# EAGLE board extruder-controller (EAGLE 5.06)
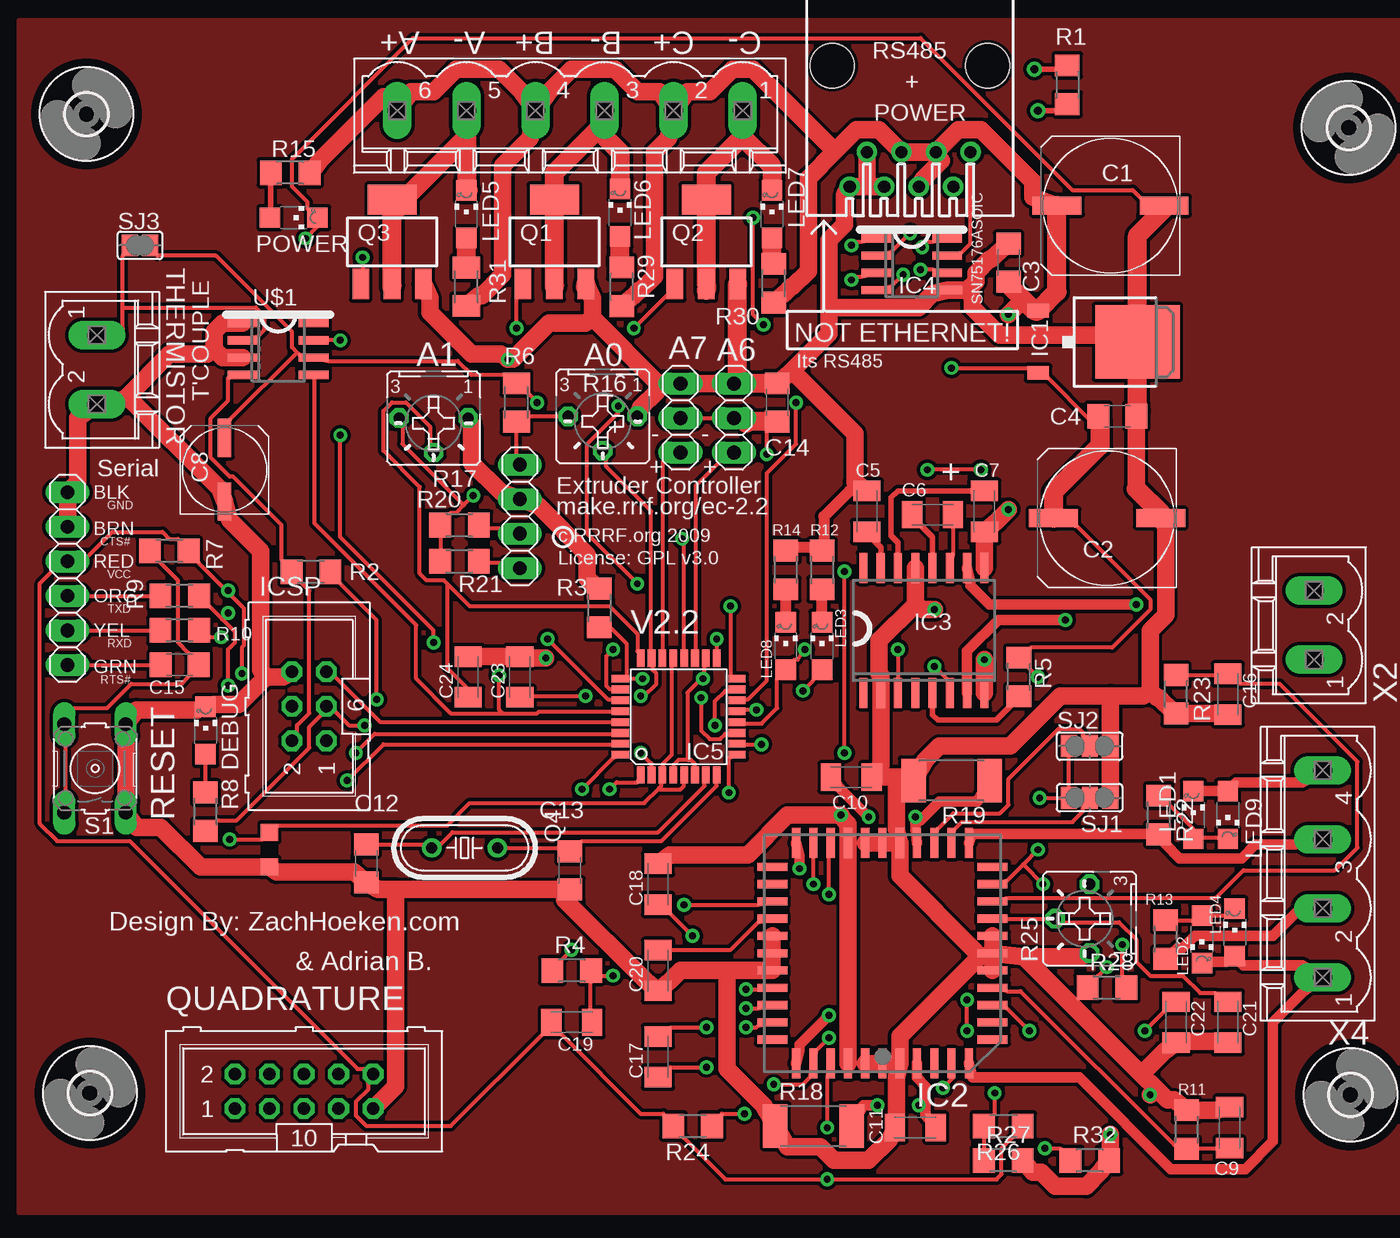
[diagram p0: board, top side]
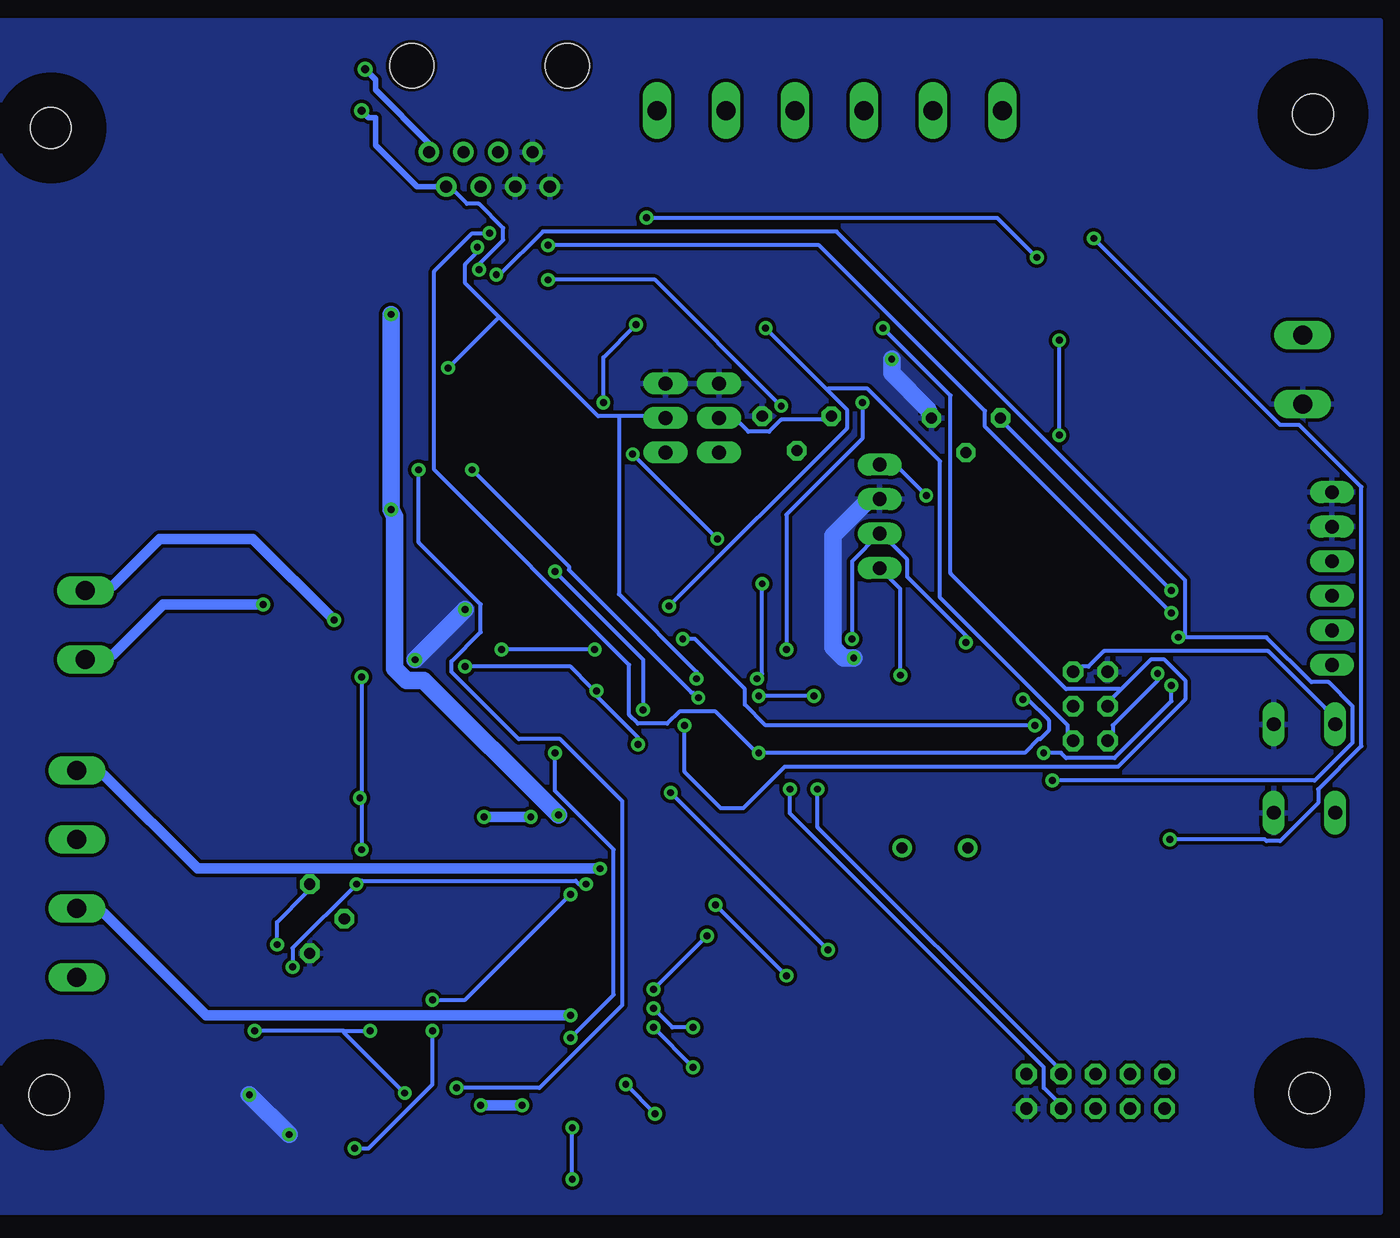
[diagram p1: board, bottom side, seen from below]

No outline drawn. Coordinates in mm, seen from the top.
Copper layers (1*16): Top 0.035mm / dielectric 1.5mm / Bottom 0.035mm
Design rules "reprap": minimum track width 8mil, minimum drill 20mil, track to track 10mil, track to pad 10mil, pad to pad 10mil, via to via 10mil, smd to smd 8mil, copper to edge 10mil, drill to drill 8mil, minimum pad ring 12mil, minimum via ring 10mil, stop-mask expansion 4mil, vias tented up to drill 25mil, thermal gap 10mil
Net classes: 0 default: width 0.305 mm; 1 power: width 1.27 mm; 2 motors: width 0.762 mm

## Footprints (pad centres in the part's own frame; a part is rotated, then mirrored left to right if it is on the bottom)
UD-10X10_NICHICON = smd 3.6 x 1.3: + 3.925,0; - -3.95,0
C1206 = smd 1.6 x 1.8: 1 -1.4,0; 2 1.4,0
C1206K = smd 1.5 x 2: 1 -1.5,0; 2 1.5,0
UD-6,3X5,8_NICHICON = smd 2.8 x 1: + 2.35,0; - -2.35,0
CHIPLED_1206 = smd 1.5 x 1.5: A 0,-1.75; C 0,1.75
3,0 = hole 3: 0,0
TO252 = smd 1 x 1.6: 1 -2.28,-4.8; 2 2.28,-4.8 | smd 5.4 x 6.2: 3 0,2.5
PLCC44 = smd 0.6 x 2.2: 1 0,8.1; 2 -1.27,8.1; 3 -2.54,8.1; 4 -3.81,8.1; 5 -5.08,8.1; 6 -6.35,8.1; 18 -6.35,-8.1; 19 -5.08,-8.1; 20 -3.81,-8.1; 21 -2.54,-8.1; 22 -1.27,-8.1; 23 0,-8.1; 24 1.27,-8.1; 25 2.54,-8.1; 26 3.81,-8.1; 27 5.08,-8.1; 28 6.35,-8.1; 40 6.35,8.1; 41 5.08,8.1; 42 3.81,8.1; 43 2.54,8.1; 44 1.27,8.1 | smd 2.2 x 0.6: 7 -8.1,6.35; 8 -8.1,5.08; 9 -8.1,3.81; 10 -8.1,2.54; 11 -8.1,1.27; 12 -8.1,0; 13 -8.1,-1.27; 14 -8.1,-2.54; 15 -8.1,-3.81; 16 -8.1,-5.08; 17 -8.1,-6.35; 29 8.1,-6.35; 30 8.1,-5.08; 31 8.1,-3.81; 32 8.1,-2.54; 33 8.1,-1.27; 34 8.1,0; 35 8.1,1.27; 36 8.1,2.54; 37 8.1,3.81; 38 8.1,5.08; 39 8.1,6.35
SO16W = smd 0.6 x 2.2: 1 -4.445,-4.6; 2 -3.175,-4.6; 3 -1.905,-4.6; 4 -0.635,-4.6; 5 0.635,-4.6; 6 1.905,-4.6; 7 3.175,-4.6; 8 4.445,-4.6; 9 4.445,4.6; 10 3.175,4.6; 11 1.905,4.6; 12 0.635,4.6; 13 -0.635,4.6; 14 -1.905,4.6; 15 -3.175,4.6; 16 -4.445,4.6
SO08 = smd 0.6 x 2.2: 1 -1.905,-2.6; 2 -0.635,-2.6; 3 0.635,-2.6; 4 1.905,-2.6; 5 1.905,2.6; 6 0.635,2.6; 7 -0.635,2.6; 8 -1.905,2.6
TQFP32-08 = smd 1.27 x 0.559: 1 -4.293,2.8; 2 -4.293,2; 3 -4.293,1.2; 4 -4.293,0.4; 5 -4.293,-0.4; 6 -4.293,-1.2; 7 -4.293,-2; 8 -4.293,-2.8; 17 4.293,-2.8; 18 4.293,-2; 19 4.293,-1.2; 20 4.293,-0.4; 21 4.293,0.4; 22 4.293,1.2; 23 4.293,2; 24 4.293,2.8 | smd 0.559 x 1.27: 9 -2.8,-4.293; 10 -2,-4.293; 11 -1.2,-4.293; 12 -0.4,-4.293; 13 0.4,-4.293; 14 1.2,-4.293; 15 2,-4.293; 16 2.8,-4.293; 25 2.8,4.293; 26 2,4.293; 27 1.2,4.293; 28 0.4,4.293; 29 -0.4,4.293; 30 -1.2,4.293; 31 -2,4.293; 32 -2.8,4.293
520426-4 = drill 0.889 round: 1 -4.445,6.35; 2 -3.175,8.89; 3 -1.905,6.35; 4 -0.635,8.89; 5 0.635,6.35; 6 1.905,8.89; 7 3.175,6.35; 8 4.445,8.89 | hole 3.251: -5.715,0; 5.715,0
1X04 = drill 1.016 long: 1 -3.81,0; 2 -1.27,0; 3 1.27,0; 4 3.81,0
1X06 = drill 1.016 long: 1 -6.35,0; 2 -3.81,0; 3 -1.27,0; 4 1.27,0; 5 3.81,0; 6 6.35,0
1X03 = drill 1.016 long: 1 -2.54,0; 2 0,0; 3 2.54,0
SOT223 = smd 1.219 x 2.235: 1 -2.311,-3.099; 2 0,-3.099; 3 2.311,-3.099 | smd 3.6 x 2.2: 4 0,3.099
HC49/S = drill 0.813 round: 1 -2.413,0; 2 2.413,0
R1206 = smd 1.6 x 1.803: 1 -1.422,0; 2 1.422,0
M1206 = smd 1.6 x 2: 1 -1.4,0; 2 1.4,0
B25P = drill 0.813 octagon: A -2.54,0; E 2.54,0; S 0,2.54
R2512 = smd 1.8 x 3.2: 1 -2.8,0; 2 2.8,0
B3F-10XX = drill 1.016 long: 1 -3.251,2.261; 2 3.251,2.261; 3 -3.251,-2.261; 4 3.251,-2.261
SJ_2 = smd 1.168 x 1.6: 1 -1.524,0; 2 0,0; 3 1.524,0
SJ = smd 1.168 x 1.6: 1 -0.762,0; 2 0.762,0
ML6 = drill 0.914 octagon: 1 -2.54,-1.27; 2 -2.54,1.27; 3 0,-1.27; 4 0,1.27; 5 2.54,-1.27; 6 2.54,1.27
ML10 = drill 0.914 octagon: 1 -5.08,-1.27; 2 -5.08,1.27; 3 -2.54,-1.27; 4 -2.54,1.27; 5 0,-1.27; 6 0,1.27; 7 2.54,-1.27; 8 2.54,1.27; 9 5.08,-1.27; 10 5.08,1.27
MSTBV6 = drill 1.397 long: 1 -12.7,0; 2 -7.62,0; 3 -2.54,0; 4 2.54,0; 5 7.62,0; 6 12.7,0
MSTBV2 = drill 1.397 long: 1 -2.54,0; 2 2.54,0
MSTBV4 = drill 1.397 long: 1 -7.62,0; 2 -2.54,0; 3 2.54,0; 4 7.62,0
GND-GNDA = smd 1.27 x 1.27: GND -1.27,0; GNDA 1.27,0

## Placement (x,y rotation side)
C1  100uF  [UD-10X10_NICHICON]  80.26,70.23 180 top
C2  100uF  [UD-10X10_NICHICON]  80.01,47.24 180 top
C3  100nF  [C1206]  72.77,66.04 90 top
C4  100nF  [C1206]  80.77,54.74 0 top
C5  .22uF  [C1206K]  62.36,47.75 270 top
C6  100nF  [C1206K]  67.18,47.5 180 top
C7  100nF  [C1206K]  70.99,47.75 270 top
C8  10uF  [UD-6,3X5,8_NICHICON]  15.11,50.8 90 top
C9  1nF  [C1206K]  89.03,2.41 90 top
C10  100nF  [C1206K]  61.21,28.19 0 top
C11  100nF  [C1206K]  65.91,2.41 0 top
C12  16pf  [C1206]  25.53,21.84 90 top
C13  16pf  [C1206]  40.51,21.34 90 top
C14  100nF  [C1206]  55.75,55.75 270 top
C15  100nF  [C1206]  11.81,36.45 180 top
C16  1nF  [C1206K]  88.9,34.29 270 top
C17  220nF  [C1206K]  46.99,7.62 90 top
C18  220nF  [C1206K]  46.99,20.32 90 top
C19  1nF  [C1206K]  40.64,10.16 180 top
C20  220nF  [C1206K]  46.99,13.97 90 top
C21  100nF  [C1206K]  88.9,10.16 270 top
C22  100nF  [C1206K]  85.09,10.16 270 top
C23  100nF  [C1206K]  36.83,35.56 90 top
C24  100nF  [C1206K]  33.02,35.56 90 top
DEBUG  [CHIPLED_1206]  13.72,31.62 0 top
H1  MOUNT-HOLE3.0  [3,0]  5.21,4.95 0 top
H2  MOUNT-HOLE3.0  [3,0]  4.95,76.96 0 top
H3  MOUNT-HOLE3.0  [3,0]  97.92,4.83 0 top
H4  MOUNT-HOLE3.0  [3,0]  97.79,75.95 90 top
IC1  7805DT  [TO252]  79.76,60.2 270 top
IC2  A3977  [PLCC44]  63.5,15.24 180 top
IC3  A3949  [SO16W]  66.55,38.99 0 top
IC4  SN75176ASOIC  [SO08]  65.66,65.91 270 top
IC5  ATMEGA168  [TQFP32-08]  48.51,32.64 90 top
J1  [520426-4]  65.53,80.52 180 top
JP4  [1X04]  36.83,47.37 270 top
JP5  [1X06]  3.56,42.8 270 top
JP6  [1X03]  52.58,54.61 270 top
JP7  [1X03]  48.64,54.61 270 top
LED1  1  [CHIPLED_1206]  86.36,25.4 0 top
LED2  1  [CHIPLED_1206]  87,16.26 180 top
LED3  2  [CHIPLED_1206]  59.05,37.85 0 top
LED4  [CHIPLED_1206]  89.41,16.76 0 top
LED5  [CHIPLED_1206]  32.89,69.6 0 top
LED6  [CHIPLED_1206]  44.2,69.72 0 top
LED7  [CHIPLED_1206]  55.37,69.6 0 top
LED8  [CHIPLED_1206]  56.39,37.85 0 top
LED9  [CHIPLED_1206]  88.9,25.4 180 top
POWER  [CHIPLED_1206]  20.19,69.34 270 top
Q1  NIF5002  [SOT223]  39.37,67.56 0 top
Q2  NIF5002  [SOT223]  50.55,67.56 0 top
Q3  NIF5002  [SOT223]  27.43,67.56 0 top
Q4  16MHZ  [HC49/S]  32.77,22.99 180 top
R1  180  [R1206]  77.09,79.12 90 top
R2  4.7k  [R1206]  21.46,43.31 180 top
R3  4.7k  [R1206]  42.67,40.64 90 top
R4  1K  [R1206]  40.64,13.97 0 top
R5  10K  [R1206]  73.53,35.56 270 top
R6  4.7K  [M1206]  36.58,55.75 270 top
R7  10K  [R1206]  11.05,44.83 0 top
R8  1K  [R1206]  13.72,25.65 270 top
R9  1K  [R1206]  11.81,41.53 0 top
R10  1K  [R1206]  11.81,38.99 0 top
R11  33K  [R1206]  85.85,2.29 90 top
R12  1K  [R1206]  59.05,43.43 90 top
R13  1K  [R1206]  84.33,16.26 270 top
R14  1K  [R1206]  56.39,43.43 270 top
R15  1K  [R1206]  19.94,72.64 0 top
R16  10K  [B25P]  42.93,54.74 180 top
R17  10K  [B25P]  30.48,54.61 180 top
R18  0.25  [R2512]  58.42,2.54 0 top
R19  0.25  [R2512]  68.58,27.94 180 top
R20  4.7K  [R1206]  32.38,46.74 180 top
R21  4.7K  [R1206]  32.38,44.07 180 top
R22  1K  [R1206]  83.82,25.4 270 top
R23  33K  [R1206]  85.09,34.29 270 top
R24  1K  [R1206]  49.53,2.54 180 top
R25  10K  [B25P]  78.74,17.78 90 top
R26  10K  [R1206]  72.39,2.54 180 top
R27  1K  [R1206]  72.39,0 0 top
R28  2K2  [R1206]  80.01,12.7 0 top
R29  1K  [R1206]  44.32,64.26 270 top
R30  1K  [R1206]  55.5,64.52 270 top
R31  1K  [M1206]  32.89,64.26 270 top
R32  1K  [R1206]  78.74,0 0 top
S1  [B3F-10XX]  5.59,28.83 90 top
SJ1  [SJ_2]  78.74,26.67 180 top
SJ2  [SJ_2]  78.74,30.48 0 top
SJ3  [SJ]  8.89,67.31 0 top
SV1  [ML6]  21.34,33.4 90 top
SV2  [ML10]  20.95,5.08 0 top
U$1  MAX6675  [SO08]  19.05,59.69 270 top
X1  MSTBV6  [MSTBV6]  40.51,77.22 180 top
X2  MSTBV2  [MSTBV2]  95.25,39.37 90 top
X3  MSTBV2  [MSTBV2]  5.71,58.17 270 top
X4  MSTBV4  [MSTBV4]  95.89,21.08 90 top
~NUDEV~1  GND-GNDA  [GND-GNDA]  18.41,22.86 90 top

## Library data of the parts
C1-C11 C14 C16-C24 R4 R6 R11-R14 R18-R24 R26-R32 = rcl
C12 C13 C15 R1-R3 R5 R7-R10 R15 = resistor
DEBUG LED1-LED9 POWER = led
H1-H4 = holes
IC1 = linear
IC2 = allegro
IC3 IC4 U$1 = reprap
IC5 = SparkFun
J1 = con-amp
JP4-JP7 = pinhead
Q1-Q3 = transistor-power
Q4 = crystal
R16 R17 R25 = pot
S1 = switch-omron
SJ1-SJ3 = jumper
SV1 SV2 = con-harting-ml
X1-X4 = con-phoenix-508
~NUDEV~1 = supply1

## Nets
+12V [power]: C1.+ C3.1 C7.2 C18.2 IC1.1 IC2.25 IC2.43 IC3.9 J1.3 J1.4 J1.5 R15.2 R29.2 R30.2 R31.2 X1.2 X1.4 X1.6
A0: C23.1 IC5.23 R16.S
A1: C24.1 IC5.24 R17.S
A2: IC4.3 IC5.25 R3.1
A3: C8.+ IC5.26 R6.1 SJ3.2 U$1.6
A6: IC5.19 JP6.3
A7: IC5.22 JP7.3
D2: IC5.32 SV2.8
D3: IC5.1 SV2.7
D4: IC4.2 IC5.2 R2.1
D5: IC5.9 R4.1
D6: IC3.6 IC5.10 LED3.A
D7: IC2.5 IC5.11
D8: IC3.3 IC5.12 LED8.A
D9: IC2.41 IC5.13 R24.1
D10: IC5.14 Q3.1
D11: IC5.15 Q1.1 SV1.4
D12: IC5.16 Q2.1 SV1.1
D13: IC5.17 R8.2 SV1.3
GND [power]: C2.- C3.2 C4.2 C5.1 C8.- C9.2 C10.2 C11.1 C12.1 C13.1 C14.1 C16.2 C20.1 C21.2 C22.2 C23.2 C24.2 DEBUG.C IC1.3 IC2.1 IC2.2 IC2.11 IC2.12 IC2.13 IC2.22 IC2.23 IC2.24 IC2.33 IC2.34 IC2.35 IC2.44 IC3.2 IC3.8 IC3.13 IC4.5 J1.6 J1.7 J1.8 JP4.2 JP5.1 JP5.2 JP6.1 JP7.1 Q1.3 Q2.3 Q3.3 R3.2 R11.2 R12.2 R14.1 R16.A R17.A R18.1 R19.2 R23.2 R25.A R27.2 R32.2 S1.3 S1.4 SJ1.1 SJ2.3 SV1.6 SV2.9 U$1.1 U$1.3 X3.2 ~NUDEV~1.GND
GNDA: C1.- IC5.3 IC5.5 IC5.21 POWER.C ~NUDEV~1.GNDA
N$1: IC4.7 J1.1 R1.2
N$2: IC4.6 J1.2 R1.1
N$3 [motors]: IC2.6 LED2.C LED4.A X4.1
N$4 [motors]: IC2.40 R13.2 X4.2
N$5: C19.1 IC2.31 R4.2
N$7: LED2.A LED4.C R13.1
N$8: DEBUG.A R8.1
N$9: C9.1 IC2.10 R11.1
N$10 [motors]: IC3.7 X2.2
N$11: C5.2 IC3.15
N$12: C16.1 IC2.15 R23.1
N$13: C6.2 IC3.12
N$14: C6.1 IC3.11
N$15: C7.1 IC3.14
N$16: IC3.5 R5.2
N$17 [motors]: IC3.10 X2.1
N$18 [motors]: C11.2 IC2.3 R18.2
N$19: LED3.C R12.1
N$20: C14.2 IC5.20
N$21: JP5.5 R10.1
N$22: JP5.4 R9.1
N$23: LED1.A LED9.C R22.1
N$24: LED8.C R14.2
N$25: POWER.A R15.1
N$26 [motors]: IC2.28 LED1.C LED9.A X4.4
N$27 [motors]: IC2.18 R22.2 X4.3
N$28: IC2.26 R32.1
N$30 [motors]: C10.1 IC2.21 R19.1
N$31: C12.2 IC5.7 Q4.2
N$32: C13.2 IC5.8 Q4.1
N$33 [power]: LED7.C Q2.2 Q2.4 X1.1
N$34 [power]: LED6.C Q1.2 Q1.4 X1.3
N$35 [power]: LED5.C Q3.2 Q3.4 X1.5
N$36: C18.1 IC2.36
N$37: C20.2 IC2.32
N$38: C17.2 IC2.37
N$39: C17.1 IC2.38
N$41: LED5.A R31.1
N$42: LED6.A R29.1
N$43: LED7.A R30.1
N$45: C22.1 IC2.9 R26.2 R27.1
N$46: IC2.19 SJ1.2
N$47: IC2.20 SJ2.2
N$48: R25.E R28.2
N$49: C21.1 IC2.14 R25.S
RESET: C15.1 IC5.29 R7.1 S1.1 S1.2 SV1.5
RTS#: C15.2 JP5.6
RX: IC4.1 IC5.30 R9.2
SCL: IC5.28 JP4.4 R21.1 U$1.5
SDA: IC5.27 JP4.3 R20.1 U$1.7
TCPL: SJ3.1 U$1.2 X3.1
TX: IC4.4 IC5.31 R10.2
VCC: C2.+ C4.1 C19.2 IC1.2 IC2.16 IC2.27 IC2.42 IC4.8 IC5.4 IC5.6 IC5.18 JP4.1 JP5.3 JP6.2 JP7.2 R2.2 R5.1 R6.2 R7.2 R16.E R17.E R20.2 R21.2 R24.2 R26.1 R28.1 SJ1.3 SJ2.1 SV1.2 SV2.10 U$1.4

## Tracks (layer width: path | path; a pad name or v marks a point on that pad's centre or on a via)
+12V  (via drill 0.51)
  Top 1.27: R29.2 45.21,63.63 45.59,64.01 45.72,64.01 46.74,65.02 46.74,74.17 47.75,75.18 X1.2 | R31.2 33.78,63.63 34.04,63.63 35.56,65.15 35.56,73.15 37.59,75.18 X1.4 | X1.4 36.96,78.61 35.31,80.26 32.13,80.26 30.48,78.61 28.83,78.61 X1.6 26.8,78.23 22.1,73.53 21.72,73.03 R15.2 | X1.2 47.12,78.61 45.47,78.61 43.81,80.26 40.64,80.26 38.99,78.61 X1.4 | 60.33,25.4 56.52,25.4 53.59,22.48 47.88,22.48 C18.2 | 60.33,25.4 60.96,24.77 IC2.25 IC2.43 | IC3.9 C7.2 71.88,46.99 v72.77,47.88 | v72.77,62.23 73.85,63.31 | J1.4 66.55,72.26 67.82,73.53 J1.3 | 60.01,74.23 61.59,75.82 63.25,75.82 J1.5 J1.3 | 60.01,74.23 58.04,72.26 58.04,65.41 56.9,64.26 56.77,64.26 56.39,63.88 R30.2 | C1.+ 74.55,70.87 74.55,72.01 70.74,75.82 69.09,75.82 J1.3 | 60.33,25.4 v60.45,25.4 | X1.2 49.15,78.61 50.8,78.61 52.45,80.26 53.98,80.26 60.01,74.23
  Top 1.397: C1.+ 76.34,63.89 74.93,62.48 74.94,62.48 IC1.1 74.68,62.48 73.85,63.31 72.64,64.52 C3.1
  Bottom 1.27: v72.77,62.23 v72.77,47.88 72.52,47.37 72.52,36.2 71.63,35.31 70.36,35.31 v60.45,25.4
A0  (via drill 0.51)
  Top 0.305: R16.S 43.18,51.56 43.18,51.05 46.48,47.75 46.48,37.47 IC5.23 46.61,36.83 46.61,36.07 46.86,35.81 46.86,35.05 45.97,34.16 v45.72,34.16 | v41.66,34.16 36.83,34.16 C23.1
  Bottom 0.305: v41.66,34.16 v45.72,34.16
A1
  Top 0.305: 31.56,42.35 31.24,42.67 29.97,42.67 29.46,43.18 29.46,49.53 26.8,52.2 26.8,55.12 27.43,55.75 28.45,55.75 30.23,53.98 30.23,52.7 R17.S | 31.56,42.35 33.15,40.77 43.43,40.77 45.47,38.73 45.47,37.47 IC5.24 | C24.1 33.02,34.67 31.5,36.2 31.5,42.29 31.56,42.35
A2  (via drill 0.51)
  Top 0.305: R3.1 43.56,39.12 44.7,37.97 44.7,35.69 IC5.25 44.83,35.43 v45.85,35.43 | v61.21,64.77 61.47,65.02 61.98,65.02 IC4.3 | v44.07,55.5 44.07,54.99 41.78,52.7 41.78,46.1 v45.47,42.42
  Bottom 0.305: v61.21,64.77 53.34,64.77 v44.07,55.5 | v45.47,42.42 45.47,35.81 v45.85,35.43
A3  (via drill 0.51)
  Top 0.305: v43.69,37.59 43.18,37.08 43.18,34.92 43.43,34.67 43.69,34.67 IC5.26 | v38.1,55.75 37.47,56.39 R6.1 35.69,57.78 33.27,57.78 32.26,58.8 22.73,58.8 U$1.6 20.57,59.31 20.45,59.44 | 20.45,59.44 20.07,59.82 20.07,60.96 14.48,66.55 10.16,66.55 SJ3.2 | 20.45,59.44 15.49,54.48 C8.+
  Bottom 0.305: v43.69,37.59 43.69,47.5 38.1,53.09 v38.1,55.75
A6
  Top 0.305: IC5.19 49.78,37.47 49.78,49.66 51.44,51.31 JP6.3
A7
  Top 0.305: IC5.22 47.37,37.47 47.37,51.44 JP7.3
D2  (via drill 0.51)
  Top 0.305: v41.4,27.3 43.69,29.59 IC5.32
  Bottom 0.305: v41.4,27.3 41.4,24.51 23.88,6.99 SV2.8
D3  (via drill 0.51)
  Top 0.305: v43.43,27.3 43.94,27.81 45.47,27.81 IC5.1
  Bottom 0.305: v43.43,27.3 43.43,25.53 24.77,6.86 24.77,5.33 23.88,4.45 SV2.7
D4  (via drill 0.51)
  Top 0.305: v45.72,29.97 46.48,29.21 46.48,28.96 IC5.2 | v26.29,33.91 26.29,39.75 23.62,42.42 R2.1 | v65.53,68.2 64.14,66.8 IC4.2
  Bottom 0.305: v26.29,33.91 25.91,33.91 24.38,32.38 24.38,31.62 25.02,30.99 25.15,30.99 26.16,29.97 v45.72,29.97 46.1,30.23 48.9,33.02 51.56,33.02 52.45,32.13 54.61,32.13 55.24,32.77 55.24,36.45 69.6,50.8 69.6,65.41 66.8,68.2 v65.53,68.2
D5  (via drill 0.51)
  Top 0.305: v52.2,27.05 52.2,29.59 IC5.9 | v40.64,15.49 40.01,14.86 R4.1
  Bottom 0.305: v40.64,15.49 v52.2,27.05
D6  (via drill 0.51)
  Top 0.305: v54.61,30.61 53.34,30.61 IC5.10 | v57.66,34.54 58.42,35.31 LED3.A | v67.31,36.32 68.2,35.43 IC3.6
  Bottom 0.305: v54.61,30.61 54.61,31.11 57.66,34.16 v57.66,34.54 58.04,34.8 59.56,36.32 v67.31,36.32
D7  (via drill 0.51)
  Top 0.305: v50.16,34.04 50.16,31.62 50.8,30.99 51.56,30.99 51.94,31.37 52.2,31.37 IC5.11 | v70.74,50.8 v66.8,50.8 | v67.94,5.33 68.71,6.1 IC2.5
  Bottom 0.305: v50.16,34.04 50.55,34.42 50.67,34.42 59.69,43.43 59.69,43.69 v66.8,50.8 | v70.74,50.8 70.74,45.47 66.17,40.89 66.17,38.86 68.33,36.7 68.33,35.94 63.37,30.99 60.33,30.99 55.75,26.42 55.75,11.43 61.85,5.33 v67.94,5.33
D8  (via drill 0.51)
  Top 0.305: v57.78,37.59 57.28,36.83 57.02,36.83 LED8.A 55.75,35.43 55.75,33.27 54.61,32.13 53.34,32.13 IC5.12 | v64.64,37.59 IC3.3
  Bottom 0.305: v57.78,37.59 v64.64,37.59
D9  (via drill 0.51)
  Top 0.305: v54.23,33.15 53.34,33.15 IC5.13 | v60.71,29.97 v60.71,43.31 | v59.56,9.02 58.67,8.13 IC2.41 58.17,6.1 57.66,5.59 v55.5,5.59 | v53.34,3.43 51.69,3.43 R24.1
  Bottom 0.305: v54.23,33.15 54.23,36.83 v60.71,43.31 | v60.71,29.97 60.71,27.18 56.39,22.86 56.39,12.19 v59.56,9.02 | v53.34,3.43 v55.5,5.59
D10  (via drill 0.51)
  Top 0.305: v57.15,55.75 57.15,52.7 54.99,50.55 54.99,35.31 53.59,33.91 53.34,33.91 IC5.14 | v54.74,61.47 53.98,62.23 v53.98,69.34 | v25.27,66.42 25.27,65.53 Q3.1
  Bottom 0.305: v57.15,55.75 57.15,59.05 v54.74,61.47 | v53.98,69.34 28.19,69.34 v25.27,66.42
D11  (via drill 0.51)
  Top 0.305: v51.18,32 51.18,33.78 51.94,34.54 52.2,34.54 IC5.15 | v36.58,61.21 36.58,63.37 Q1.1
  Bottom 0.305: v51.18,32 51.18,28.57 48.51,25.91 46.86,25.91 43.81,28.96 19.3,28.96 14.35,33.91 14.35,35.31 15.88,36.83 16.89,36.83 19.11,34.61 | 19.11,34.61 19.68,34.04 SV1.4 | v36.58,61.21 31.62,56.26 31.62,43.18 23.11,34.67 19.18,34.67 19.11,34.61
D12  (via drill 0.51)
  Top 0.305: v52.32,40.77 52.32,35.69 IC5.16 | v45.21,61.21 47.75,63.75 Q2.1
  Bottom 0.305: v52.32,40.77 39.24,53.85 39.24,55.24 40.7,56.71 | 40.7,56.71 v45.21,61.21 | SV1.1 22.99,31.5 22.99,32 32.38,41.4 32.38,51.44 37.72,56.77 40.64,56.77 40.7,56.71
D13  (via drill 0.51)
  Top 0.305: v51.31,38.35 51.31,37.47 IC5.17 | v25.4,32 24.26,32 23.24,33.02 SV1.3 22.23,32.77 21.34,31.88 21.34,30.35 16,25.02 14.61,25.02 R8.2
  Bottom 0.305: v51.31,38.35 50.42,38.35 46.74,34.67 46.74,33.53 45.21,32 v25.4,32
GND  (via drill 0.51)
  Top 0.813: C5.1 61.06,49.25 59.18,47.37 59.18,45.21 59.05,45.09 | 59.05,45.09 R12.2 | 56.39,44.83 56.26,44.7 | 56.39,44.83 R14.1 | 59.05,45.09 56.64,45.09 56.39,44.83
  Top 1.27: 52.83,57.15 JP6.1 JP7.1 47.12,57.02 | 42.16,61.98 42.16,63.37 Q1.3 | 47.12,57.02 42.16,61.98 | R16.A 45.72,55.37 46.86,56.52 47.12,57.02 | 42.16,61.98 41.66,61.59 38.99,61.59 36.32,58.93 v35.94,58.93 35.43,59.31 33.27,59.31 30.23,62.36 30.23,63.37 Q3.3 | 18.16,35.56 19.43,35.56 SV1.6 | 18.16,35.56 16.13,33.53 14.35,33.53 DEBUG.C 13.08,33.15 8.64,33.15 S1.4 7.87,30.48 7.87,27.18 S1.3 8.64,24.51 10.41,24.51 13.34,21.59 ~NUDEV~1.GND 18.92,21.21 24.64,21.21 C12.1 26.42,19.94 27.69,19.94 | 18.16,35.56 17.78,36.07 17.78,44.83 15.49,47.12 C8.- 14.73,49.4 7.94,56.2 | 27.69,19.94 39.62,19.94 C13.1 40.13,19.18 46.1,13.21 C20.1 47.88,13.21 48.64,13.97 52.07,13.97 | SV2.9 27.69,5.46 27.69,19.94 | C16.2 88.01,32.89 85.98,32.89 R23.2 84.2,33.66 83.82,34.04 83.69,34.04 83.19,34.54 | 83.19,34.54 83.19,38.99 84.33,40.13 84.33,46.61 C2.- | IC2.24 62.48,23.37 63.25,23.37 IC2.23 64.14,23.37 64.52,23.37 IC2.22 | 64.52,28.19 64.9,28.19 R19.2 66.67,29.46 67.69,30.48 72.9,30.48 76.58,34.16 80.26,34.16 | 64.52,28.19 C10.2 63.37,29.08 IC3.2 63.37,35.69 63.25,35.81 63.25,38.23 65.91,40.89 | 65.91,40.89 IC3.13 | IC2.22 64.52,24.38 64.52,28.19 | IC2.33 55.37,16.26 55.37,15.88 IC2.34 55.37,14.99 55.37,14.22 IC2.35 52.07,13.97 | IC2.44 62.48,7.11 63.25,7.11 IC2.1 64.14,7.11 64.73,6.97 | 64.73,6.97 64.52,6.1 64.52,3.3 C11.1 64.01,1.52 62.48,0 59.94,0 58.93,1.02 56.52,1.02 R18.1 54.74,4.06 52.07,6.73 52.07,13.97 | 64.73,6.97 IC2.2 64.77,9.14 70.61,14.99 | C9.2 88.14,3.68 86.74,3.68 R11.2 84.96,4.45 84.45,4.45 83.63,5.27 | IC2.11 71.63,14.22 71.63,14.99 IC2.12 | IC2.13 71.63,16.26 71.63,15.88 IC2.12
  Top 1.27: 74.36,14.54 73.91,14.99 IC2.12 | 74.36,14.54 82.55,6.35 | 82.55,6.35 83.63,5.27 | 70.61,14.99 IC2.12 | IC2.22 64.77,20.95 70.23,15.49 70.61,14.99 | 80.26,34.16 82.68,34.16 83.19,34.54 | 62.36,71.63 J1.8 60.71,70.99 60.71,68.83 59.56,67.69 59.56,62.74 | 62.36,71.63 J1.6 | 62.36,71.63 J1.7 | 59.56,62.74 59.56,60.83 56.83,58.1 | 56.83,58.1 56.64,57.91 C14.1 | C5.1 61.47,49.91 61.47,53.47 56.83,58.1 | 69.72,64.01 70.36,64.64 70.36,65.28 71.37,66.29 71.5,66.29 71.88,66.67 C3.2 | 69.72,64.01 IC4.5 67.18,63.75 66.17,62.74 59.56,62.74 | R27.2 74.55,-0.89 75.18,-0.89 76.2,-1.91 78.49,-1.91 79.5,-0.89 R32.2 80.26,0.89 v80.26,1.91 | SJ1.1 SJ2.3 80.26,34.16 | 82.55,6.35 84.2,8 C22.2 85.98,8.76 88.01,8.76 C21.2 | v67.31,40.51 66.42,40.51 65.91,40.89 | v70.99,36.83 IC3.8 | R25.A 78.11,14.99 74.8,14.99 74.36,14.54 | 83.63,5.27 v83.19,4.83 | 69.72,64.01 70.1,63.5 70.1,62.74 72.14,60.71 79.25,60.71 IC1.3 | JP5.2 JP5.1 4.32,49.91 4.32,54.61 X3.2 7.75,56.01 7.94,56.2 | 14.35,59.69 14.99,59.05 U$1.3 | 14.35,59.69 14.35,60.96 14.99,61.59 U$1.1 | 7.94,56.2 11.05,59.31 13.84,59.31 14.35,59.69 | R3.2 41.78,42.8 41.78,44.58 38.23,48.13 JP4.2 35.43,49.15 33.27,51.31 33.27,53.98 R17.A | 82.17,49.4 82.17,50.04 82.17,53.85 C4.2 82.3,55.63 82.26,55.63 | C24.2 33.02,37.08 36.83,37.08 C23.2 37.34,36.96 v38.73,36.96
  Top 1.397: IC1.3 82.3,60.2 | 84.21,70.22 84.33,70.1 82.26,68.03 IC1.3 | 82.17,54.99 82.3,55.12 82.26,55.16 82.26,55.63 IC1.3 | C2.- 83.96,47.38 84.07,47.5 82.17,49.4 | C14.1 52.83,57.15 52.83,64.39 52.86,64.41 Q2.3 | 41.66,64.26 41.68,64.29 Q1.3
  Bottom 1.27: v35.94,58.93 35.94,57.91 33.27,55.24 R17.A | v67.31,40.51 v70.99,36.83 | v83.19,4.83 v80.26,1.91 | v38.73,36.96 39.5,36.96 40.26,37.72 40.26,45.97 37.59,48.64 JP4.2
  pour Bottom: 0,83.82 102.87,83.82 102.87,-3.81 0,-3.81
GNDA  (via drill 0.51)
  Top 0.305: 47.05,27.37 47.24,27.56 47.24,27.81 IC5.3 47.37,28.96 47.37,29.21 48.01,29.84 48.01,36.32 IC5.21 | 47.05,27.37 45.97,26.29 33.15,26.29 31.5,24.64 18.92,24.64 ~NUDEV~1.GNDA 17.91,23.62 v15.49,23.62 | IC5.5 48.9,27.81 48.9,27.56 48.64,27.3 47.12,27.3 47.05,27.37 | C1.- 82.42,70.87 81.92,71.37 77.47,71.37 66.29,82.55 28.96,82.55 20.07,73.66 20.07,71.63 21.21,70.48 21.21,69.98 POWER.C 21.97,68.71 v21.08,67.82
  Bottom 0.305: v15.49,23.62 8.51,23.62 8.38,23.5 7.37,23.5 4.57,26.29 4.57,27.3 1.4,30.48 1.4,49.53 5.97,54.1 7.37,54.1 v21.08,67.82
N$1  (via drill 0.6)
  Top 0.305: IC4.7 69.34,66.8 69.98,67.44 J1.1
  Top 0.406: R1.2 77.19,80.54 77.22,80.52 76.96,80.26 v74.68,80.26
  Bottom 0.406: J1.1 69.98,74.8 73.91,78.74 73.91,79.5 v74.68,80.26
N$2  (via drill 0.51, 0.6)
  Top 0.305: v66.29,65.53 67.18,65.53 IC4.6
  Top 0.406: 77.19,77.7 77.22,77.72 | 77.19,77.7 R1.1 | v74.93,77.22 76.71,77.22 77.19,77.7
  Bottom 0.305: v66.29,65.53 66.29,65.91 64.52,67.69 64.52,68.58 66.29,70.36 67.18,70.36 68.07,71.25 J1.2
  Bottom 0.406: J1.2 70.87,71.63 73.91,74.68 73.91,76.71 74.42,76.71 v74.93,77.22
N$3
  Top 0.762: LED2.C 87.63,14.61 88.77,14.61 LED4.A 90.04,14.35 94.36,14.35 X4.1 94.49,12.45 92.2,10.16 92.2,1.4 90.17,-0.64 84.71,-0.64 77.98,6.1 70.1,6.1 IC2.6
N$4  (via drill 0.51)
  Top 0.762: R13.2 85.22,15.62 85.6,15.62 86.49,16.51 92.2,16.51 93.85,18.16 X4.2 | v59.56,10.67 57.4,8.51 57.4,8.13 IC2.40
  Bottom 0.762: v59.56,10.67 86.36,10.67 93.85,18.16 X4.2
N$5  (via drill 0.51)
  Top 0.305: C19.1 42.04,11.05 42.04,13.08 R4.2 42.8,13.59 v43.69,13.59 | v48.9,18.8 54.36,18.8 IC2.31
  Bottom 0.305: v43.69,13.59 v48.9,18.8
N$6
  pour Top: 0,83.82 102.87,83.82 102.87,-3.81 0,-3.81
N$7
  Top 0.305: LED4.C 88.77,18.03 87.63,18.03 LED2.A 86.36,17.65 85.22,17.65 R13.1
N$8
  Top 0.305: R8.1 DEBUG.A
N$9
  Top 0.305: C9.1 88.14,0.89 86.74,0.89 R11.1 84.96,1.14 73.66,12.45 72.64,12.45 IC2.10
N$10  (via drill 0.51)
  Top 0.762: v76.96,39.75 72.01,39.75 69.72,37.47 IC3.7
  Bottom 0.762: v76.96,39.75 82.93,45.72 89.79,45.72 93.22,42.29 X2.2
N$11
  Top 0.406: C5.2 62.36,46.1 63.37,45.09 IC3.15
N$12
  Top 0.305: R23.1 85.98,35.69 88.01,35.69 C16.1 89.79,35.05 92.71,35.05 98.42,29.34 98.42,22.99 96.77,21.34 90.04,21.34 88.01,19.3 72.64,19.3 IC2.15
N$13
  Top 0.406: C6.2 65.68,47.4 65.66,47.37 67.18,45.85 IC3.12
N$14
  Top 0.305: C6.1 68.71,46.61 68.71,44.58 IC3.11
  Top 0.406: C6.1 68.58,47.5 68.45,47.37
N$15
  Top 0.406: C7.1 64.62,49.25 64.14,48.77 64.14,45.97 64.64,45.47 IC3.14
N$16
  Top 0.406: IC3.5 67.18,32.77 67.56,32.38 71.88,32.38 73.53,34.04 R5.2
N$17  (via drill 0.51)
  Top 0.762: v82.17,40.89 71.37,40.89 69.98,42.29 69.98,42.55 IC3.10
  Bottom 0.762: v82.17,40.89 89.53,40.89 93.22,37.21 X2.1
N$18  (via drill 0.51)
  Top 0.762: 66.67,4.06 66.67,5.46 66.04,6.1 IC2.3 | 66.67,4.06 66.67,3.3 C11.2 | v63.12,4.06 62.1,4.06 R18.2 | v66.17,4.06 66.67,4.06
  Bottom 0.762: v63.12,4.06 v66.17,4.06
N$19
  Top 0.813: R12.1 59.08,42.14 59.18,42.04 59.05,41.91 LED3.C
N$20  (via drill 0.51)
  Top 0.305: v48.77,45.72 48.9,45.59 48.9,37.47 IC5.20 | v54.99,51.94 54.99,53.59 C14.2
  Top 1.397: C14.2 53.34,54.35 53.47,54.23
  Bottom 0.305: v48.77,45.72 v54.99,51.94
N$21
  Top 0.305: JP5.5 R10.1
N$22
  Top 0.305: JP5.4 R9.1
N$23
  Top 0.305: LED9.C 88.27,23.75 87,23.75 LED1.A 86.36,24.38 84.71,26.04 R22.1
N$24
  Top 0.813: 56.39,42.04 R14.2 LED8.C
N$25
  Top 0.406: POWER.A 18.41,69.34 18.52,69.44 R15.1
N$26  (via drill 0.51)
  Top 0.762: LED1.C 87,27.18 88.27,27.18 LED9.A 89.53,27.81 94.36,27.81 X4.4 | v57.4,21.46 57.4,22.35 IC2.28
  Bottom 0.762: v57.4,21.46 87,21.46 93.85,28.32 X4.4
N$27
  Top 0.762: IC2.18 70.1,24 82.93,24 R22.2 84.33,23.24 85.34,22.23 89.92,22.23 90.93,23.24 93.85,23.24 X4.3
N$28  (via drill 0.51)
  Top 0.305: v75.44,0.89 76.58,0.89 R32.1 | v69.72,9.53 v69.72,11.81 | v59.56,19.56 59.56,22.35 IC2.26
  Bottom 0.305: v75.44,0.89 74.42,0.89 69.72,5.59 v69.72,9.53 | v69.72,11.81 67.31,11.81 v59.56,19.56
N$30  (via drill 0.51)
  Top 0.762: v62.48,25.27 60.45,27.3 C10.1 | IC2.21 65.91,24.38 v65.91,25.27 66.29,25.02 67.69,26.42 70.48,26.42 R19.1
  Bottom 0.762: v62.48,25.27 v65.91,25.27
N$31
  Top 0.305: IC5.7 50.42,27.81 50.42,27.56 46.99,24.13 31.88,24.13 30.99,23.24 Q4.2 29.72,23.24 26.42,23.24 C12.2
N$32
  Top 0.305: IC5.8 51.31,27.81 51.31,27.56 47.24,23.5 41.4,23.5 C13.2 39.62,22.99 Q4.1
N$33
  Top 1.397: 53.21,75.31 X1.1 | 53.21,75.31 50.55,72.64 Q2.4 Q2.2 50.55,64.01 | LED7.C 55.37,73.15 53.21,75.31
N$34
  Top 1.397: 39.37,64.26 Q1.2 Q1.4 39.37,72.64 43.05,76.33 X1.3 42.93,77.22 42.93,75.44 44.2,74.17 LED6.C
N$35
  Top 1.397: 28.19,70.61 Q3.4 | 32.89,75.31 X1.5 | 28.19,70.61 32.89,75.31 | LED5.C 33.05,71.35 32.89,71.5 32.89,75.31 | 28.19,70.61 28.19,70.36 27.43,69.6 Q3.2 27.43,64.26
N$36  (via drill 0.51)
  Top 0.305: v49.53,16.51 47.88,18.16 C18.1 | v53.47,12.57 54.36,12.57 IC2.36
  Bottom 0.305: v49.53,16.51 v53.47,12.57
N$37
  Top 0.305: C20.2 47.88,15.49 52.32,15.49 54.36,17.53 IC2.32
N$38  (via drill 0.51)
  Top 0.305: v50.55,9.78 47.88,9.78 C17.2 | v53.47,11.18 54.36,11.18 IC2.37
  Bottom 0.305: v50.55,9.78 52.07,9.78 v53.47,11.18
N$39  (via drill 0.51)
  Top 0.305: v50.55,6.86 47.88,6.86 C17.1 | v53.47,9.78 54.23,9.78 54.36,9.91 IC2.38
  Bottom 0.305: v50.55,6.86 v53.47,9.78
N$41
  Top 1.397: R31.1 32.77,65.79 32.89,65.91 LED5.A
N$42
  Top 1.397: R29.1 44.09,65.94 44.2,65.79 LED6.A
N$43
  Top 1.397: R30.1 55.47,65.94 55.37,66.04 LED7.A
N$45  (via drill 0.51)
  Top 0.305: R27.1 70.99,0.89 70.99,1.65 R26.2 71.75,3.43 v71.75,4.95 | v82.8,9.53 84.2,10.92 C22.1 | v74.3,9.53 72.64,11.18 IC2.9
  Bottom 0.305: 76.2,9.53 v74.3,9.53 | 76.2,9.53 v82.8,9.53 | v71.75,4.95 76.2,9.4 76.2,9.53
N$46
  Top 0.305: SJ1.2 78.23,25.91 78.23,25.65 77.47,24.89 69.34,24.89 68.83,24.38 IC2.19
N$47
  Top 0.305: SJ2.2 78.23,31.24 78.23,31.5 77.98,31.75 76.45,31.75 72.77,28.07 72.77,26.16 72.14,25.53 68.71,25.53 67.56,24.38 IC2.20
N$48  (via drill 0.51)
  Top 0.305: v81.15,15.88 81.15,13.59 R28.2
  Bottom 0.305: v81.15,15.88 81.15,17.53 78.99,19.68 R25.E
N$49
  Top 0.305: C21.1 88.01,12.32 86.87,12.32 85.6,13.59 83.19,13.59 82.17,14.61 82.17,16.26 80.9,17.53 76.83,17.53 R25.S IC2.14
RESET
  Top 0.305: IC5.29 43.69,32.26 26.54,32.26 23.24,35.56 SV1.5 | S1.1 3.43,27.18 3.43,30.48 S1.2 4.06,33.27 6.48,33.27 8.26,35.05 11.94,35.05 12.45,35.56 C15.1 12.45,37.34 11.68,38.1 11.68,42.67 10.41,43.94 R7.1
  Bottom 0.305: SV1.5 21.97,36.32 21.46,36.32 20.32,37.47 8.26,37.47 4.06,33.27 S1.2
RTS#
  Top 0.305: JP5.6 C15.2
RX  (via drill 0.51)
  Top 0.305: v24.77,29.97 26.16,31.37 43.69,31.37 IC5.30 | v15.37,34.92 15.37,37.59 15.88,38.1 15.88,38.86 14.92,39.81 | 14.92,39.81 13.97,40.77 R9.2 | v61.21,67.31 61.47,67.56 61.98,67.56 IC4.1 | 14.92,39.81 v15.37,40.26
  Bottom 0.305: v24.77,29.97 23.5,29.97 23.11,29.59 19.56,29.59 15.37,33.78 v15.37,34.92 | v61.21,67.31 41.27,67.31 29.08,55.12 29.08,53.98 v15.37,40.26
SCL  (via drill 0.51)
  Top 0.305: R21.1 34.54,43.94 35.31,43.94 JP4.4 | 35.56,32.89 38.1,32.89 38.23,33.02 44.2,33.02 IC5.28 | 35.56,32.89 35.31,33.15 v35.31,35.69 | U$1.5 21.72,57.78 21.72,46.86 29.21,39.37 29.21,35.43 31.75,32.89 35.56,32.89
  Bottom 0.305: v35.31,35.69 35.31,42.04 JP4.4
SDA  (via drill 0.51)
  Top 0.305: R20.1 34.54,46.48 35.31,46.48 JP4.3 | v38.86,38.35 43.31,33.91 44.2,33.91 IC5.27 | v23.62,53.34 23.62,45.85 30.48,38.99 v30.48,38.1 | v23.62,60.33 U$1.7
  Bottom 0.305: v38.86,38.35 38.86,44.07 JP4.3 36.7,46.1 34.8,44.2 34.8,42.93 30.48,38.61 v30.48,38.1 | v23.62,53.34 v23.62,60.33
TCPL
  Top 0.305: 7.62,62.74 7.62,61.21 X3.1 | 7.62,62.74 7.62,66.55 SJ3.1 | U$1.2 17.53,60.58 18.03,61.09 18.03,62.1 17.4,62.74 7.62,62.74
TX  (via drill 0.51)
  Top 0.305: v24.13,27.94 26.8,30.61 43.69,30.61 IC5.31 | v14.86,38.48 13.97,38.48 R10.2 | v65.02,65.15 64.14,64.26 IC4.4
  Bottom 0.305: v24.13,27.94 4.83,27.94 2.03,30.73 2.03,33.4 3.81,35.18 5.08,35.18 8.38,38.48 14.35,38.48 | 14.35,38.48 v14.86,38.48 | v65.02,65.15 64.77,65.15 61.59,68.33 40.01,68.33 14.35,42.67 14.35,38.48
VCC  (via drill 0.51)
  Top 0.305: R21.2 30.99,44.96 30.99,45.85 R20.2 31.75,47.62 32.13,47.62 32.7,48.2 | JP4.1 36.58,51.94 R6.2 37.47,54.74 R16.E | 32.7,48.2 v33.4,48.9 | JP7.2 JP6.2 | R17.E 28.19,53.98 28.19,52.7 32.7,48.2 | v16.38,35.81 16.38,37.72 16.51,37.85 16.51,40.64 15.3,41.85 | 15.3,41.85 13.21,43.94 R7.2 11.68,45.72 11.05,45.72 10.54,46.23 6.86,46.23 5.08,44.45 JP5.3 2.41,43.31 1.52,42.42 1.52,24.77 2.79,23.5 8.13,23.5 24.89,6.73 25.4,6.73 SV2.10 25.65,5.71 25.65,5.21 24.77,4.32 24.77,3.3 25.53,2.54 31.75,2.54 38.48,9.27 C19.2 39.88,9.27 45.72,3.43 47.37,3.43 R24.2 48.9,1.65 51.94,-1.4 v59.44,-1.4 71.88,-1.4 72.26,-1.02 72.26,0.89 73.03,1.65 R26.1 | 15.3,41.85 v15.37,41.91 | C2.+ 77.85,46.61 83.19,41.27 83.19,40.51 80.39,37.72 74.42,37.72 R5.1 74.3,36.2 v74.93,35.56 | 73.85,21.78 72.64,20.57 IC2.16 | v74.93,22.86 73.85,21.78 | v59.44,2.41 59.44,6.1 IC2.42 | SJ2.1 SJ1.3 v75.06,26.67 | v80.01,14.22 79.38,13.59 R28.1 | 73.85,21.78 v75.31,20.32 | v58.42,20.32 IC2.27 | 49.15,29.46 49.4,29.46 49.66,29.21 49.66,28.96 IC5.6 | 49.15,29.46 48.51,29.46 48.13,29.08 48.13,28.96 IC5.4 | 50.23,35.5 49.15,34.42 49.15,29.46 | 50.23,35.5 50.42,35.69 50.42,36.32 IC5.18 | v66.42,67.18 66.8,67.56 67.18,67.56 IC4.8 | v50.29,35.43 50.23,35.5 | v68.58,58.29 74.17,58.29 IC1.2 75.69,57.53 78.61,54.61 78.74,54.61 C4.1 79.5,54.36 | SV1.2 20.45,31.5 20.45,32 21.34,32.89 21.34,41.91 20.83,42.42 R2.2 19.3,44.2 19.3,46.74 15.75,50.29 15.49,50.29 14.1,51.69 14.1,54.61 15.37,55.88 15.37,57.53 U$1.4
  Top 1.397: C2.+ 76.08,49.16 79.5,52.58 79.5,54.36 79.37,54.49
  Bottom 0.305: v33.4,48.9 35.31,50.8 JP4.1 | R16.E 41.02,54.48 44.07,54.48 44.96,53.59 46.48,53.59 47.12,54.23 JP7.2 | v16.38,35.81 16.38,35.31 19.68,32 19.68,31.5 SV1.2 | v15.37,41.91 27.56,54.1 R17.E | 74.93,26.67 v74.93,22.86 | v74.93,35.56 74.93,26.67 | v59.44,-1.4 v59.44,2.41 | v80.01,14.22 80.01,15.62 v75.31,20.32 74.93,20.57 59.18,20.57 58.93,20.32 v58.42,20.32 | 74.93,26.67 v75.06,26.67 | v66.42,67.18 66.42,66.8 67.31,65.91 67.31,64.52 64.83,62.04 | 64.83,62.04 57.53,54.74 56.01,54.74 | 56.01,54.74 54.1,54.74 JP6.2 | v50.29,35.43 50.29,35.94 56.01,41.66 56.01,54.74 | 64.83,62.04 v68.58,58.29

## Text on the board
tPlace: A+ | A- | B+ | B- | C+ | C- | RS485 | + | POWER | THERMISTOR | T'COUPLE | NOT ETHERNET! | A7 | A6 | A0 | Its RS485 | - | + | - | - | Serial | + | + | + | BLK | Extruder Controller | GND | make.rrrf.org/ec-2.2 | BRN | CTS# | c RRRF.org 2009 | RED | License: GPL v3.0 | VCC | ICSP | ORG | TXD | V2.2 | YEL | RXD | GRN | RTS# | RESET | Design By: ZachHoeken.com | & Adrian B. | QUADRATURE
tNames: A1